# Altium PCB OnkoV1.PcbDoc (part 1 of 2)
Units mil, origin at the board's own origin, x right, y up, seen from the top; angles counter-clockwise.
Board outline 5157.48 x 3228.35 mil, 2 copper layers (Top Layer, Bottom Layer); 231 components, 195 nets, 743 pads, 146 vias.
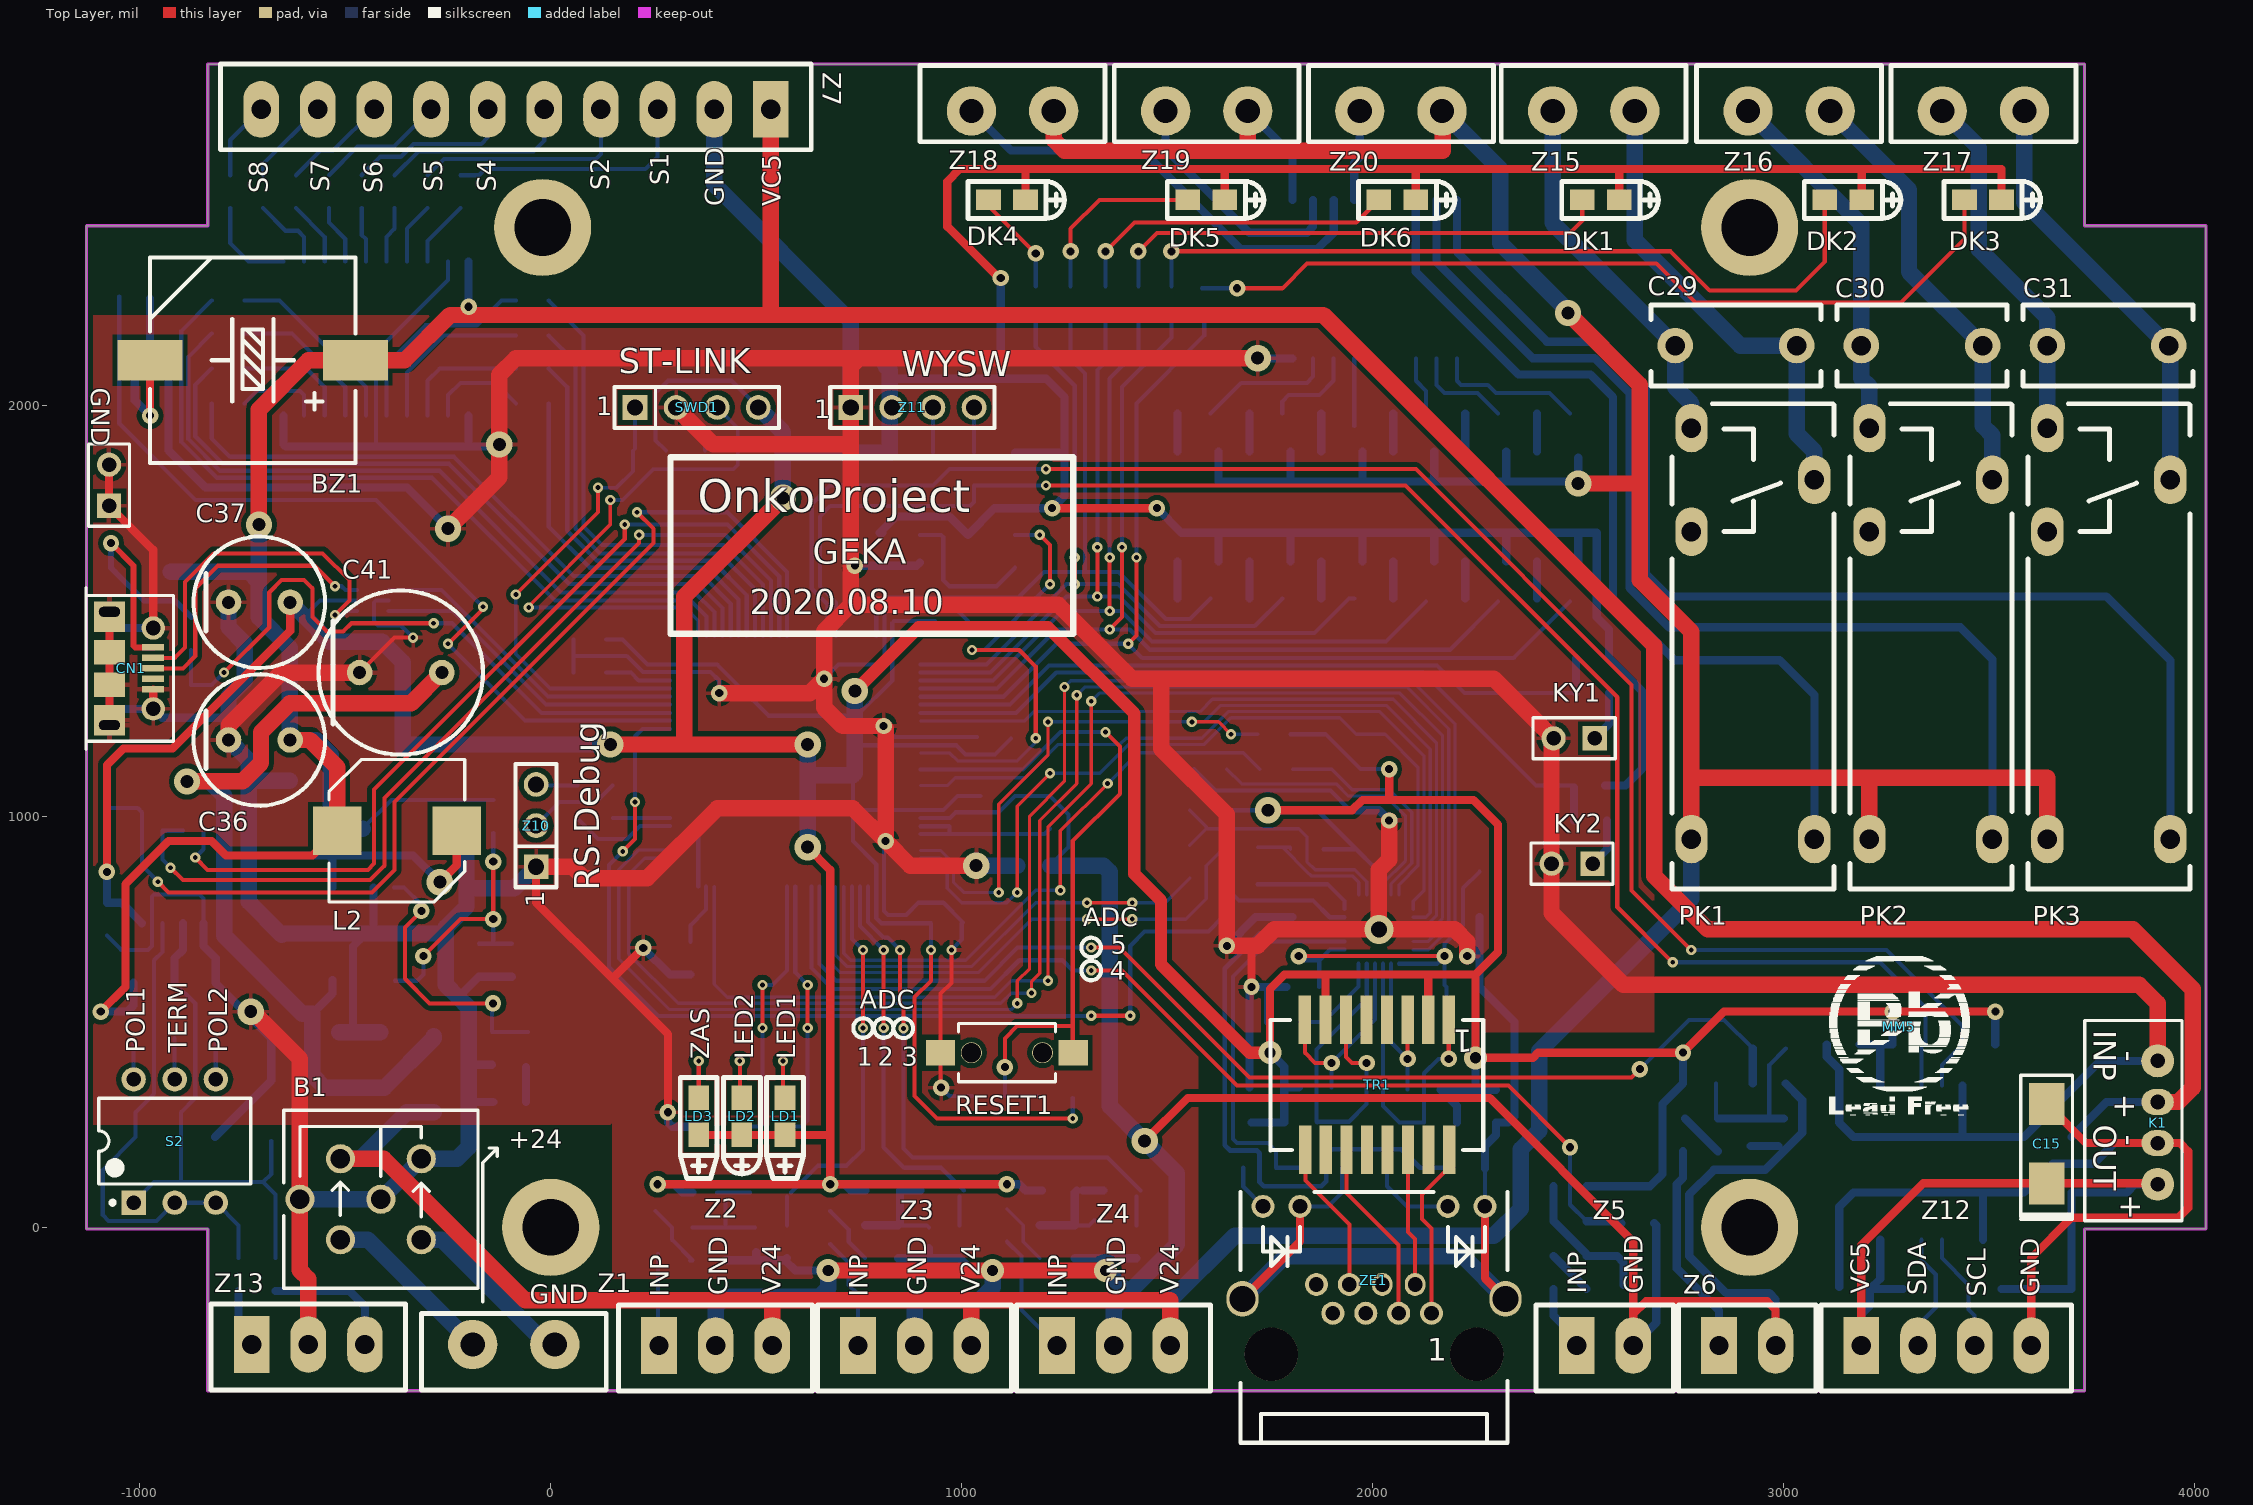
[diagram p0: Top Layer view]
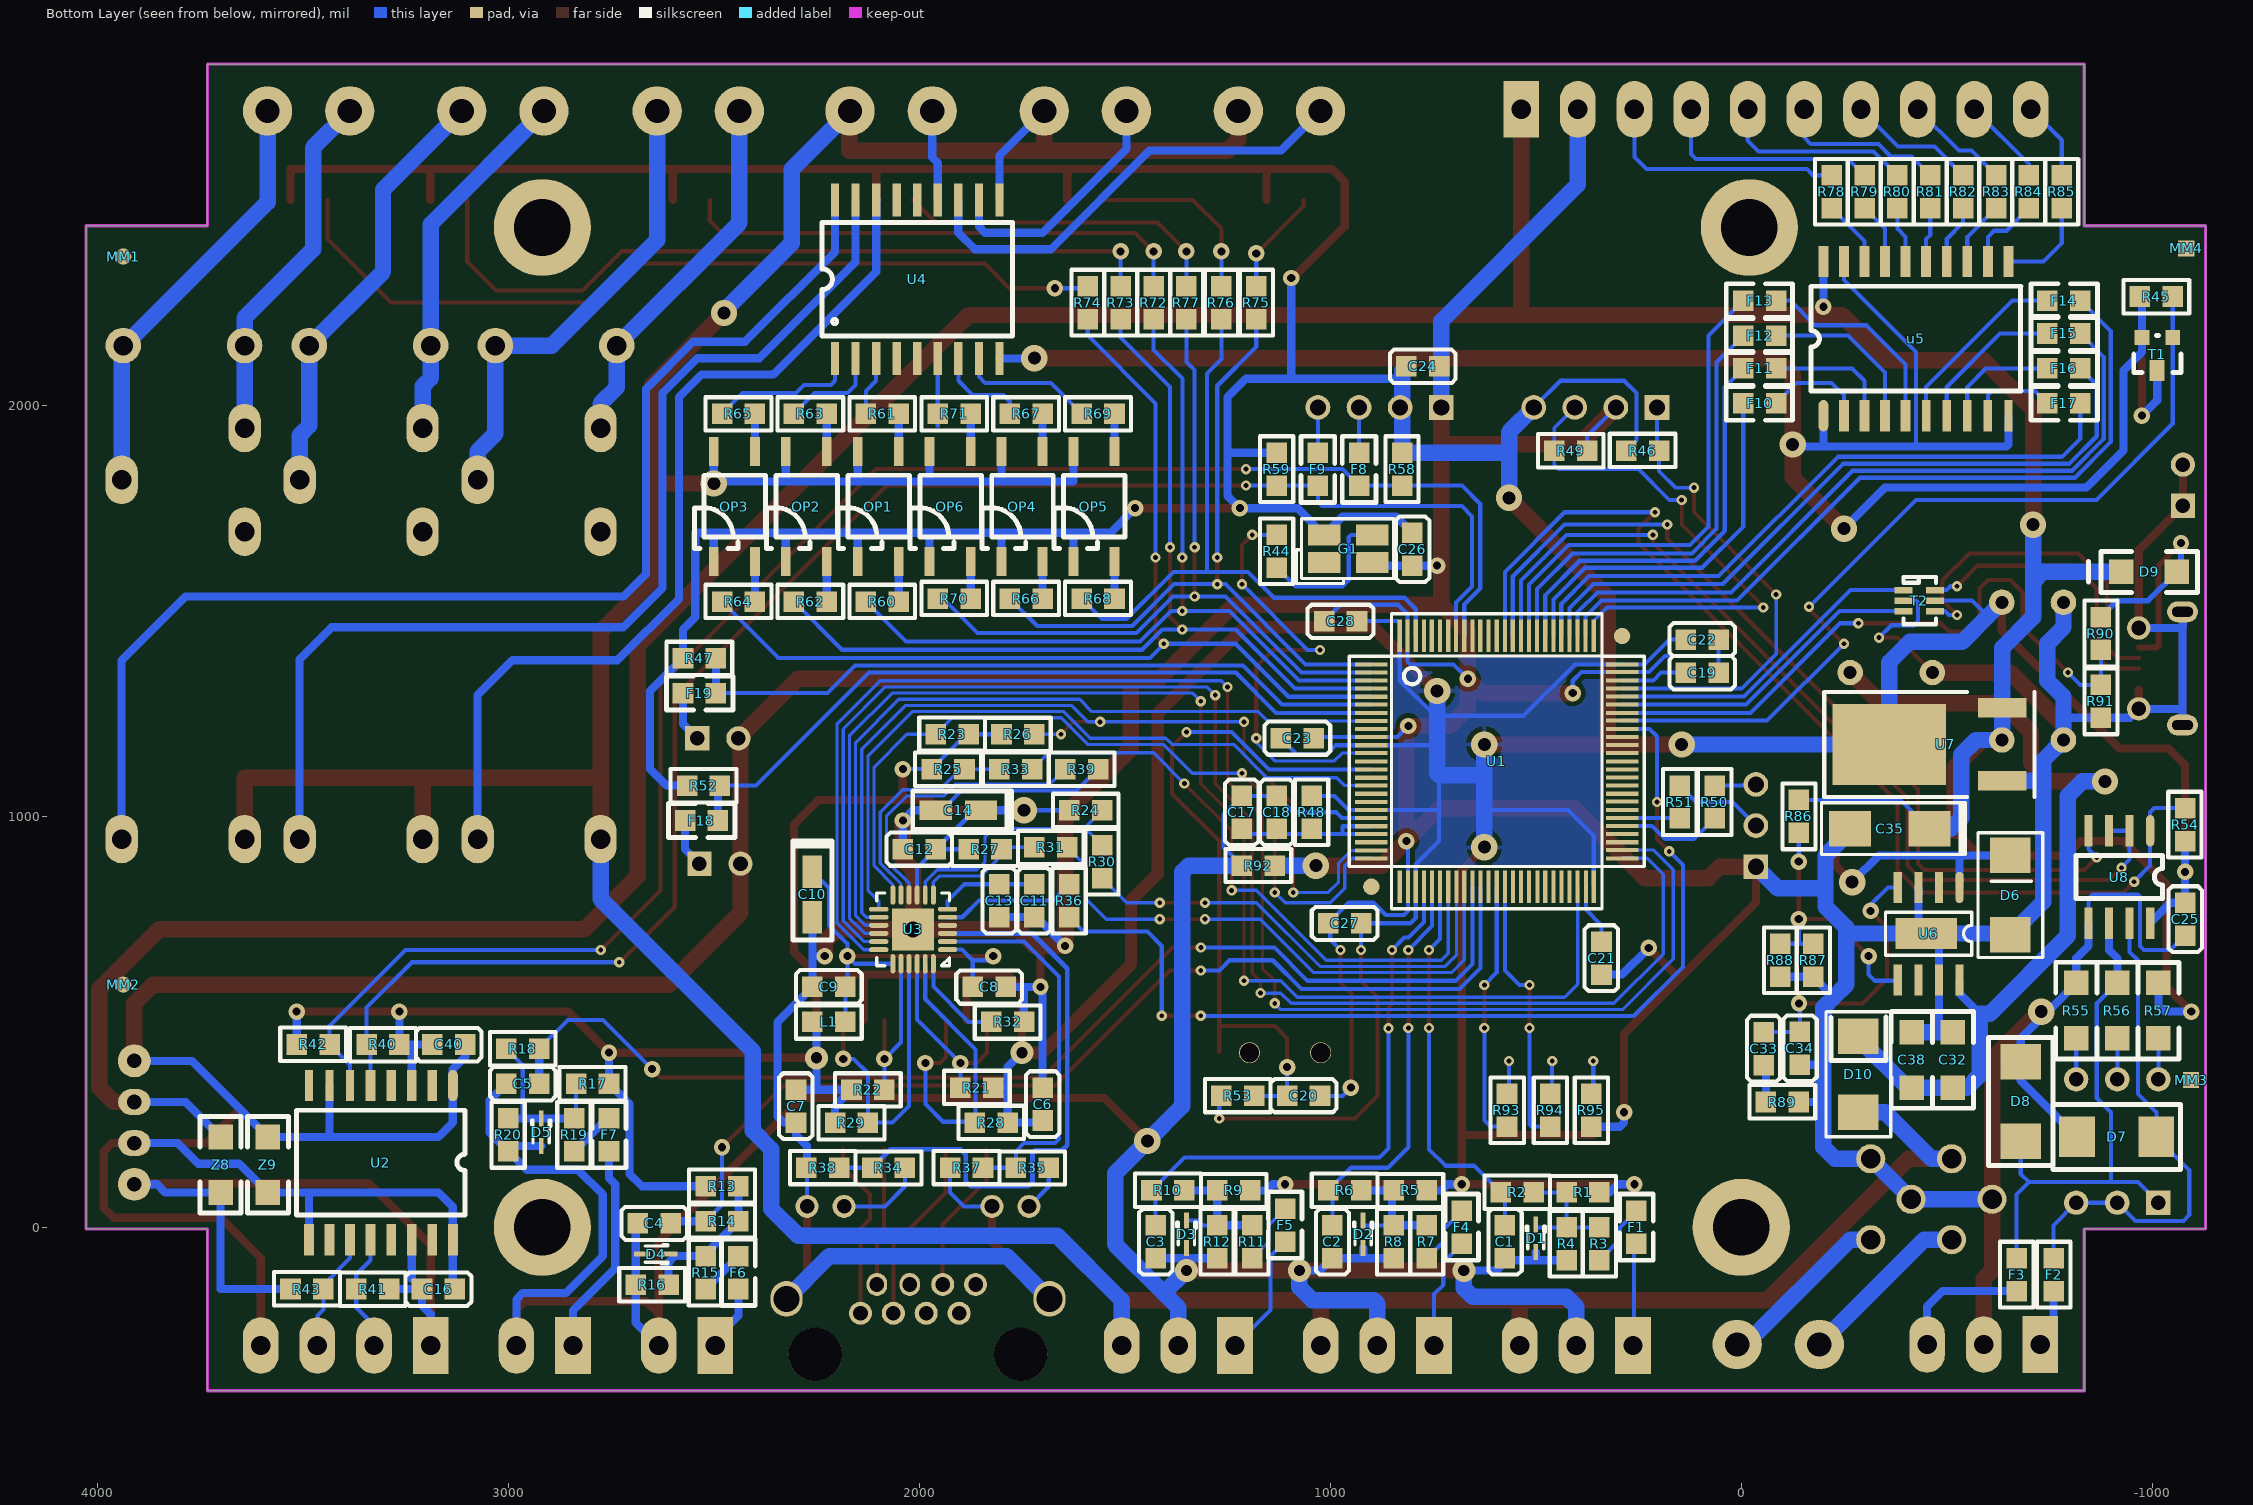
[diagram p1: Bottom Layer view, seen from below]

## Layer stack, top to bottom
Top Layer: signal copper 1.4
Dielectric: dielectric 12.6, FR-4, Dk 4.8
Bottom Layer: signal copper 1.4

## Board outline
-834.65,-397.64 -834.65,-3.94 -1129.92,-3.94 -1129.92,2437.01 -834.65,2437.01 -834.65,2830.71 3732.28,2830.71 3732.28,2437.01 4027.56,2437.01 4027.56,-3.94 3732.28,-3.94 3732.28,-397.64

## Design rules (kind name [scope] priority, off if disabled: settings)
Clearance Clearance_Poly [InPolygon vs not (InPolygon)] p1: gap=12
Clearance [All] p2: gap=7
ComponentClearance [All] p1 off: gap=10 collisioncheckmode=3 verticalgap=10 showdistances=FALSE
DiffPairsRouting [All] p1: maxlimit=10 minlimit=10 mostfreqgap=10 maxuncoupledlength=500
HoleSize [All] p1: absolutevalues=TRUE maxlimit=196.85 minlimit=11.81 maxpercent=80.000 minpercent=20.000
MatchedLengths "Schematic Matched Net Lengths_3" [InNet('RD_N')] p1: tolerance=300 checknetsindiffpair=TRUE checkdiffpairvsdiffpair=TRUE checkothers=TRUE
MatchedLengths "Schematic Matched Net Lengths" [InNet('TD_P')] p2: tolerance=300 checknetsindiffpair=TRUE checkdiffpairvsdiffpair=TRUE checkothers=TRUE
MinimumSolderMaskSliver [All] p1: minsoldermaskwidth=6
PolygonConnect [All] p1: connectstyle=Relief reliefconductorwidth=10 reliefentries=4 polygonreliefangle="90 Angle"
RoutingVias [All] p1: holewidth=12 width=25 viastyle="Through Hole" minholewidth=12 minwidth=25 maxholewidth=40 maxwidth=100
SilkToSilkClearance [All] p1: silktosilkclearance=6
SilkscreenOverComponentPads [All] p1: minsilkscreentomaskgap=4
SolderMaskExpansion [All] p1: expansion=4
Width [All] p1: maxlimit=200 minlimit=8 preferedwidth=10 minimp=50.000000 maximp=50.000000 favimp=50.000000
22 further rules are at their usual default settings.

## Classes and differential pairs
net class Class_4-20: _XA6 _XA7 _XA8 GNDI SCL_I SDA_I VCI5
net class ETHERNET: ERX+ ERX- ETH9 ETH10 ETH11 ETH12 ETH13 ETH14 ETH15 ETH16 ETX+ ETX-
differential pair RD: +RD_P -RD_N
differential pair TD: +TD_P -TD_N
differential pair USB_FS1: +USB_FS1_P -USB_FS1_N

## Components (designator, comment, footprint, x,y, rotation, side; value= is the part's Value field where it differs from the comment)
B1 "BNX002" BNX002 -177.2,284.96 r0 top (schematic designator FF1)
BZ1 "LD-BZEG-1305" LD-BZEG-1305 -475,2110 r0 top
C1 "10n" 0805C 575,5 r270 bottom
C2 "10n" 0805C 995,5 r270 bottom
C3 "10n" 0805C 1425,5 r270 bottom
C4 "10n" 0805C 2605,10 r0 bottom
C5 "10n" 0805C 2925,350 r0 bottom
C6 "100nF" 0805C 1700,340 r270 bottom
C7 "100nF" 0805C 2300,255 r90 bottom
C8 "100nF" 0805C 1790,585 r0 bottom
C9 "100nF" 0805C 2260,585 r180 bottom
C10 "10uF/6v3" CAP_A 2260,755 r90 bottom
C11 "470pF" 0805C 1720,755 r90 bottom
C12 "100nF" 0805C 2040,920 r180 bottom
C13 "2.2uF" 0805C 1805,755 r90 bottom
C14 "10uF/6v3" CAP_A 1960,1015 r180 bottom
C15 "47uF/6V" CAP_C 3640,300 r270 top
C16 "100nF" 0805C 3130,-150 r0 bottom
C17 "2u2" 0805C 1215,970 r90 bottom
C18 "100n" 0805C 1130,970 r90 bottom
C19 "2u2" 0805C 55,1350 r0 bottom
C20 "10n" 0805C 1105,320 r180 bottom
C21 "2u2" 0805C 340,615 r90 bottom
C22 "100n" 0805C 135,1430 r180 bottom
C23 "100n" 0805C 1120,1190 r180 bottom
C24 "100n" 0805C 815,2095 r180 bottom
C25 "100n" 0805C -1080,790 r270 bottom
C26 "100n" 0805C 800,1690 r270 bottom
C27 "100n" 0805C 925,740 r0 bottom
C28 "100n" 0805C 935,1475 r0 bottom
C29 "4n7/3kV" CAP_75 2736.22,2145.67 r180 top (schematic designator C18)
C30 "4n7/3kV" CAP_75 3188.98,2145.67 r180 top (schematic designator C18)
C31 "4n7/3kV" CAP_75 3641.73,2145.67 r180 top (schematic designator C18)
C32 "4u7/25V" 1206 -515.21,475 r270 bottom
C33 "22nF" 0805C -55,395 r90 bottom
C34 "470p" 0805C -142.74,475.89 r270 bottom
C35 "100uF/6v3" CAP_C -265,970 r180 bottom
C36 "470uF/16V" RB-.15/.30 -784.09,1185.94 r0 top
C37 "470uF/16V" RB-.15/.30 -784.09,1520.94 r0 top
C38 "4u7/25V" 1206 -415.21,475 r270 bottom
C40 "100nF" 0805C 3105,445 r0 bottom
C41 "1000uF/25V" RB-.2/.4 -465,1350 r180 top
CN1 "MX-105017-0001" MOLEX_MICROUSB_MX-105017-0001 -995,1360 r270 top
D1 "ESD5Z3.3T1G" SOD_523 500,-60 r90 bottom
D2 "ESD5Z3.3T1G" SOD_523 920,-50 r90 bottom
D3 "ESD5Z3.3T1G" SOD_523 1350,-50 r90 bottom
D4 "ESD5Z3.3T1G" SOD_523 2675,-65 r180 bottom
D5 "ESD5Z3.3T1G" SOD_523 2920,198.07 r90 bottom
D6 "SK26" RD5 -655,712.09 r90 bottom
D7 "SM6T6V8CA" RD5_U -817.09,220 r180 bottom
D8 "SM6T6V8CA" RD5_U -680,402.91 r270 bottom
D9 "CRS14" 1206D -1060.13,1594.79 r0 bottom
D10 "MB1" SMB -285,465.04 r270 bottom
DK1 "" 0805LR 2600,2500 r0 top
DK2 "" 0805LR 3190,2500 r0 top
DK3 "" 0805LR 3530,2500 r0 top
DK4 "" 0805LR 1155,2500 r0 top
DK5 "" 0805LR 1640,2500 r0 top
DK6 "" 0805LR 2105,2500 r0 top
F1 "BLM18BB141SN1D" 0805L 255,-40 r90 bottom
F2 "BLM21A102SPT" 0805 -760,-75 r270 bottom
F3 "BLM21A102SPT" 0805 -670,-75 r270 bottom
F4 "BLM18BB141SN1D" 0805L 680,-40 r90 bottom
F5 "BLM18BB141SN1D" 0805L 1110,-35 r90 bottom
F6 "BLM18BB141SN1D" 0805L 2440,-150 r90 bottom
F7 "BLM18BB141SN1D" 0805L 2755,185 r90 bottom
F8 "BLM18BB141SN1D" 0805L 930,1885 r270 bottom
F9 "BLM18BB141SN1D" 0805L 1030,1885 r270 bottom
F10 "BLM18BB141SN1D" 0805L -85,2005 r0 bottom
F11 "BLM18BB141SN1D" 0805L -85,2090 r0 bottom
F12 "BLM18BB141SN1D" 0805L -85,2170 r0 bottom
F13 "BLM18BB141SN1D" 0805L -85,2255 r0 bottom
F14 "BLM18BB141SN1D" 0805L -745,2255 r180 bottom
F15 "BLM18BB141SN1D" 0805L -745,2175 r180 bottom
F16 "BLM18BB141SN1D" 0805L -745,2090 r180 bottom
F17 "BLM18BB141SN1D" 0805L -745,2005 r180 bottom
F18 "BLM18BB141SN1D" 0805L 2570,990 r180 bottom
F19 "BLM18BB141SN1D" 0805L 2575,1300 r180 bottom
G1 "CFPS-39-25M" GEN_SMD1_1 1015,1618 r180 bottom
GND "Header 2" HDR1X2 -1074.8,1755.91 r90 top
K1 "DC1S-0505S" DCDC_SIL4 3910,405 r270 top
KY1 "Header 2" HDR1X2 2540,1190 r180 top
KY2 "Header 2" HDR1X2 2535,885 r180 top
L1 "BLM18PG121SN1D" 0805 2180,500 r0 bottom
L2 "DER0705-15" DER0705_1 -228.66,965 r180 top
LD1 "" 0805LG 570,225 r270 top
LD2 "" 0805LR 465,225 r270 top
LD3 "" 0805LG 360,225 r270 top
MM1 "" REF_CIR 3937.01,2362.2 r180 bottom
MM2 "" REF_CIR 3937.01,590.55 r270 bottom
MM3 "" REF_SQR -1094.49,358.27 r270 bottom
MM4 "" REF_SQR -1082.68,2381.89 r270 bottom
MM5 "" PB_FREE_GRAF 3279.53,488.19 r0 top
OP1 "TLP181" TLP181_1 2150,1620 r180 bottom
OP2 "TLP181" TLP181_1 2325,1620 r180 bottom
OP3 "TLP181" TLP181_1 2500,1620 r180 bottom
OP4 "TLP181" TLP181_1 1800,1620 r180 bottom
OP5 "TLP181" TLP181_1 1625,1620 r180 bottom
OP6 "TLP181" TLP181_1 1975,1620 r180 bottom
PK1 "RM96" RM96A 2775.59,944.88 r90 top
PK2 "RM96" RM96A 3208.66,944.88 r90 top
PK3 "RM96" RM96A 3641.73,944.88 r90 top
R1 "nc" 0805R 345,85 r0 bottom
R2 "100R" 0805R 585,85 r180 bottom
R3 "2k2" 0805R 345,-80 r90 bottom
R4 "1k" 0805R 425,-80 r90 bottom
R5 "nc" 0805R 765,90 r0 bottom
R6 "100R" 0805R 1005,90 r180 bottom
R7 "680R" 0805R 765,-75 r90 bottom
R8 "1k" 0805R 845,-75 r90 bottom
R9 "nc" 0805R 1195,90 r0 bottom
R10 "100R" 0805R 1435,90 r180 bottom
R11 "680R" 0805R 1190,-75 r90 bottom
R12 "1k" 0805R 1275,-75 r90 bottom
R13 "nc" 0805R 2520,100 r180 bottom
R14 "100R" 0805R 2520,15 r180 bottom
R15 "680R" 0805R 2520,-150 r90 bottom
R16 "1k" 0805R 2690,-140 r180 bottom
R17 "nc" 0805R 2755,350 r0 bottom
R18 "100R" 0805R 2925,435 r0 bottom
R19 "2k2" 0805R 2840,185 r90 bottom
R20 "1k" 0805R 3000,185 r90 bottom
R21 "50R" 0805R 1900,340 r180 bottom
R22 "50R" 0805R 2085,335 r0 bottom
R23 "4k7" 0805R 1960,1200 r180 bottom
R24 "4k7" 0805R 1555,1015 r0 bottom
R25 "4k7" 0805R 1890,1115 r0 bottom
R26 "4k7" 0805R 1720,1200 r0 bottom
R27 "4k7" 0805R 1800,920 r0 bottom
R28 "50R" 0805R 1865,255 r180 bottom
R29 "50R" 0805R 2125,255 r0 bottom
R30 "33R" 0805R 1555,850 r90 bottom
R31 "33R" 0805R 1640,925 r0 bottom
R32 "12k1" 0805R 1745,500 r0 bottom
R33 "33R" 0805R 1725,1115 r0 bottom
R34 "1k" 0805R 2035,145 r0 bottom
R35 "1k" 0805R 1685,145 r0 bottom
R36 "33R" 0805R 1635,755 r90 bottom
R37 "10k" 0805R 1925,145 r180 bottom
R38 "10k" 0805R 2275,145 r180 bottom
R39 "4k7" 0805R 1565,1115 r0 bottom
R40 "4k7" 0805R 3265,445 r0 bottom
R41 "4k7" 0805R 3290,-150 r0 bottom
R42 "4k7" 0805R 3515,445 r180 bottom
R43 "4k7" 0805R 3530,-150 r180 bottom
R44 "33R" 0805R 1130,1605 r90 bottom
R45 "10k" 0805 -1050,2265 r0 bottom
R46 "10k" 0805R 280,1890 r180 bottom
R47 "10k" 0805R 2495,1385 r0 bottom
R48 "100R" 0805 1045,970 r90 bottom
R49 "10k" 0805R 375,1890 r0 bottom
R50 "33R" 0805R 65,1075 r270 bottom
R51 "33R" 0805R 150,1075 r270 bottom
R52 "10k" 0805R 2485,1075 r0 bottom
R53 "10k" 0805R 1265,320 r180 bottom
R54 "10k" 0805R -1080,940 r90 bottom
R55 "470R" 1206 -815,460 r90 bottom
R56 "120R" 1206 -915,460 r90 bottom
R57 "470R" 1206 -1014.79,459.87 r90 bottom
R58 "10k" 0805R 825,1805 r90 bottom
R59 "10k" 0805R 1130,1805 r90 bottom
R60 "1k" 0805R 2130,1522.72 r180 bottom
R61 "4k7" 0805R 2050,1980 r0 bottom
R62 "1k" 0805R 2305,1522.72 r180 bottom
R63 "4k7" 0805R 2225,1980 r0 bottom
R64 "1k" 0805R 2480,1522.72 r180 bottom
R65 "4k7" 0805R 2400,1980 r0 bottom
R66 "1k" 0805R 1780,1530 r180 bottom
R67 "4k7" 0805R 1700,1980 r0 bottom
R68 "1k" 0805R 1605,1530 r180 bottom
R69 "4k7" 0805R 1525,1980 r0 bottom
R70 "1k" 0805R 1955,1530 r180 bottom
R71 "4k7" 0805R 1875,1980 r0 bottom
R72 "1k" 0805R 1430,2290 r270 bottom
R73 "1k" 0805R 1510,2290 r270 bottom
R74 "1k" 0805R 1590,2290 r270 bottom
R75 "1k" 0805R 1180,2290 r270 bottom
R76 "1k" 0805R 1265,2290 r270 bottom
R77 "1k" 0805R 1350,2290 r270 bottom
R78 "1k" 0805R -220,2480 r90 bottom
R79 "1k" 0805R -300,2480 r90 bottom
R80 "1k" 0805R -380,2480 r90 bottom
R81 "1k" 0805R -460,2480 r90 bottom
R82 "1k" 0805R -540,2480 r90 bottom
R83 "1k" 0805R -620,2480 r90 bottom
R84 "1k" 0805R -700,2480 r90 bottom
R85 "1k" 0805R -780,2480 r90 bottom
R86 "10k" 0805R -140,1040 r270 bottom
R87 "3k3" 0805R -175,690 r270 bottom
R88 "100k" 0805R -95,690 r270 bottom
R89 "4k7" 0805R -60,305 r180 bottom
R90 "1k" 0805R -875,1485 r270 bottom
R91 "4k7" 0805R -875,1320 r270 bottom
R92 "0R" 0805 1215,880 r180 bottom
R93 "4k7" 0805R 570,325 r270 bottom
R94 "4k7" 0805R 465,325 r270 bottom
R95 "4k7" 0805R 365,325 r270 bottom
RESET1 "SW-PB" DTSM31N_2 1110,425 r90 top
S2 "SW DIP-3" DIP-6 -915,210 r90 top
SWD1 "ST-LINK" PIN4 205,1995 r0 top
T1 "2N7002" SOT23 -1011,2078 r270 bottom
T2 "USBUF01W6" SOTT323-6L -395,1550.59 r270 bottom
TR1 "H1102NL" H1102 2185,505 r180 top locked
U1 "STM32F427VGT6" VQ100_2 900,1370 r90 bottom locked
U2 "ADuM2250" SMD16B 3135,345 r180 bottom
U3 "LAN8742A-CZ-TR" QFN24_LAN 2015,725 r180 bottom
U4 "ULN2803A" SO-18 2205,2114.17 r180 bottom
u5 "74HCT541D" SMD20 -200,1975 r90 bottom
U6 "L5973D_2" SO8_M -531,827 r0 bottom
U7 "LD1117V33" DPAK -635,1087 r90 bottom
U8 "MAX485" SO8 -995,965 r90 bottom
Z1 "CON2" ARC-L-2-5.08 10,-285 r180 top
Z2 "Header 3" ARC-L-3-3.5 263.31,-287.4 r0 top
Z3 "Header 3" ARC-L-3-3.5 747.56,-287.4 r0 top
Z4 "Header 3" ARC-L-3-3.5 1231.81,-287.4 r0 top
Z5 "Header 2" ARC-L-2-3.5 2496.06,-287.4 r0 top locked
Z6 "Header 2" ARC-L-2-3.5 2842.52,-287.4 r0 top locked
Z7 "Header 10" ARC-L-10-3.5 535.43,2720.47 r180 top
Z8 "0R" 1206R 3700,220 r90 bottom
Z9 "0R" 1206R 3585,220 r90 bottom
Z10 "RS-Debug" PIN3 -35.65,877.67 r0 top
Z11 "WYSW" PIN4 730,1995 r0 top
Z12 "Header 4" ARC-L-4-3.5 3188.98,-287.4 r0 top locked
Z13 "Header 3" ARC-L-3-3.5 -727.79,-285 r0 top
Z15 "CON2" ARC-L-2-5.08 2437.8,2716.54 r0 top
Z16 "CON2" ARC-L-2-5.08 2913.39,2716.54 r0 top
Z17 "CON2" ARC-L-2-5.08 3385.83,2716.54 r0 top
Z18 "CON2" ARC-L-2-5.08 1023.62,2716.54 r0 top
Z19 "CON2" ARC-L-2-5.08 1496.06,2716.54 r0 top
Z20 "CON2" ARC-L-2-5.08 1968.5,2716.54 r0 top
ZE1 "WURTH 615 008 137 421" RJ45GELED 1753.11,-308.98 r0 top locked

## Footprints (in the part's own frame and the unit in brackets; to place one, negate y for a bottom-side part, rotate by r counter-clockwise, add the part's x,y. Pads: shape width x height; smd on the part's side, far side on the other; paste and mask are expansions set on the pad)
0805 [mil]
  rect 50x50 smd: 1(0,0) 2(80,0)
  silkscreen extent -40,-40 120,41
0805C [mil]
  rect 50x50 smd: 1(0,0) 2(80,0)
  silkscreen extent -40,-40 120,41
0805L [mil]
  rect 50x50 smd: 1(0,0) 2(80,0)
  silkscreen extent -40,-41 122,41
0805LG [mil]
  rect 60x50 smd: A(0,0) K(-90,0)
  silkscreen extent -140,-45 106,45
0805LR [mil]
  rect 60x50 smd: A(0,0) K(-90,0)
  silkscreen extent -140,-45 95,45
0805R [mil]
  rect 50x50 smd: 1(0,0) 2(80,0)
  silkscreen extent -40,-40 120,41
1206 [mil]
  rect 60x60 smd: 1(0.13,-0.21) 2(135.13,-0.21)
  silkscreen extent -50,-50 185,50
1206D [mil]
  rect 60x60 smd: A(0.13,-0.21) K(135.13,-0.21)
  silkscreen extent -50,-50 215,50
1206R [mil]
  rect 60x60 smd: 1(0,0) 2(-135,0)
  silkscreen extent -185,-50 50,50
ARC-L-2-3.5 [mm]
  rect 2.2x3.5 hole 1.2: 1(0,0)
  oval 2.2x3.5 hole 1.2: 2(3.5,0)
  silkscreen extent -2.5,-2.8 6,2.5
ARC-L-2-5.08 [mil]
  round 120 hole 59.06: 1(0,0) 2(200,0)
  silkscreen extent -125,-75 325,110
ARC-L-3-3.5 [mm]
  rect 2.2x3.5 hole 1.2: 1(0,0)
  oval 2.2x3.5 hole 1.2: 2(3.5,0) 3(7,0)
  silkscreen extent -2.5,-2.8 9.5,2.5
ARC-L-4-3.5 [mm]
  rect 2.2x3.5 hole 1.2: 1(0,0)
  oval 2.2x3.5 hole 1.2: 2(3.5,0) 3(7,0) 4(10.5,0)
  silkscreen extent -2.5,-2.8 13,2.5
ARC-L-10-3.5 [mm]
  rect 2.2x3.5 hole 1.2: 1(0,0)
  oval 2.2x3.5 hole 1.2: 2(3.5,0) 3(7,0) 4(10.5,0) 5(14,0) 6(17.5,0) 7(21,0) 8(24.5,0) 9(28,0) 10(31.5,0)
  silkscreen extent -2.5,-2.8 34,2.5
BNX002 [mm]
  round 1.8 hole 1.2: B(-8.5,-8) CB(-8.5,-3) CG1(-3.5,-3) CG2(-6,-5.5) CG3(-11,-5.5) PSG(-3.5,-8)
  silkscreen extent -12,-11 0,0
CAP_75 [mm]
  round 2.2 hole 1.2: 1(0,0) 2(-7.5,0)
  silkscreen extent -9,-2.5 1.5,2.5
CAP_A [mm]
  rect 2x1.2 smd: 1(0,0) 2(2.8,0)
  silkscreen extent -1.42,-1.21 4.7,1.2
CAP_C [mm]
  rect 2.6x2.2 smd: 1(0,0) 2(4.9,0)
  silkscreen extent -1.78,-1.6 7.11,1.6
DCDC_SIL4 [mm]
  round 2.032 hole 0.9: 1(0,0) 4(7.62,0)
  oval 1.6x2 hole 0.9: 2(2.54,0) 3(5.08,0)
  silkscreen extent -2.5,-4.5 9.88,1.5
DER0705_1 [mm]
  rect 3x3 smd: 1(0,0) 2(7.4,0)
  silkscreen extent -0.5,-4.4 7.9,4.4
DIP-6 [mm] "DIP; 6 Leads; Row Spacing 7.62 mm; Pitch 2.54 mm"
  rect 1.5x1.5 hole 0.9: 1(-3.81,2.54)
  round 1.5 hole 0.9: 2(-3.81,0) 3(-3.81,-2.54) 4(3.81,-2.54) 5(3.81,0) 6(3.81,2.54)
  silkscreen extent -3.93,-4.7 2.65,4.7, body extent -3.55,-4.7 3.55,4.7, height 5.46
DPAK [mil]
  rect 47x118 smd: 1(0,0) 3(177,0)
  rect 197x276 smd: 2(88,275)
  silkscreen extent -40,-79 216,433
DTSM31N_2 [mm]
  round 1.3 hole 1.2 mask+0: 0(0,2.2) 0(0,-2.2)
  rect 1.6x1.8 smd: 1(0,4.1) 2(0,-4.1)
  silkscreen extent -1.8,-3 1.8,3
GEN_SMD1_1 [mm]
  rect 2x1.3 smd: 1(0,0) 2(2.972,0) 3(2.972,1.702) 4(0,1.702)
  silkscreen extent -1.7,-1.3 4.3,2.7
H1102 [mm]
  rect 0.76x3 smd: 1(0,0) 2(1.27,0) 3(2.54,0) 4(3.81,0) 5(5.08,0) 6(6.35,0) 7(7.62,0) 8(8.89,0) 9(8.865,8.026) 10(7.595,8.026) 11(6.325,8.026) 12(5.055,8.026) 13(3.785,8.026) 14(2.515,8.026) 15(1.245,8.026) 16(-0.025,8.026)
  silkscreen extent -2.13,0 11.02,8.08
HDR1X2 [mm] "Connector; Header; 2 Position"
  rect 1.5x1.5 hole 0.9: 1(0,0)
  round 1.5 hole 0.9: 2(2.54,0)
  silkscreen extent -1.27,-1.27 3.81,1.27
LD-BZEG-1305 [mm]
  rect 4x2.524 smd: 1(0,0) 2(-12.7,0)
  silkscreen extent -12.7,-6.35 0,6.35
MOLEX_MICROUSB_MX-105017-0001 [mm]
  rect 0.4x1.35 smd mask+0.152: 1(-1.3,0.7) 2(-0.65,0.7) 3(0,0.7) 4(0.65,0.7) 5(1.3,0.7)
  oval 1.3x1.9 hole 0.6 slot 1.3 at 90 deg: 6(-3.5,-2) 6(3.5,-2)
  rect 1.9x1.9 smd: 6(-3.2,-2) 6(3.2,-2)
  round 1.45 hole 0.9 mask+0.152: 6(-2.5,0.7) 6(2.5,0.7)
  rect 1.5x1.9 smd: 6(-1,-2) 6(1,-2)
  silkscreen extent -5,-3.45 5,1.95
PB_FREE_GRAF [mil]
  silkscreen extent -169,-215 174,181
PIN3 [mil]
  rect 60x60 hole 39.37: 1(0,0)
  round 60 hole 39.37: 2(0,100) 3(0,200)
  silkscreen extent -50,-50 50,250
PIN4 [mil]
  rect 60x60 hole 39.37: 1(0,0)
  round 60 hole 39.37: 2(100,0) 3(200,0) 4(300,0)
  silkscreen extent -50,-50 350,50
QFN24_LAN [mm]
  oval 1.2x0.3 smd mask+0.152: 1(2.125,-1.25) 2(2.125,-0.75) 3(2.125,-0.25) 4(2.125,0.25) 5(2.125,0.75) 6(2.125,1.25) 13(-2.125,1.25) 14(-2.125,0.75) 15(-2.125,0.25) 16(-2.125,-0.25) 17(-2.125,-0.75) 18(-2.125,-1.25)
  oval 0.3x1.2 smd mask+0.152: 7(1.25,2.125) 8(0.75,2.125) 9(0.25,2.125) 10(-0.25,2.125) 11(-0.75,2.125) 12(-1.25,2.125) 19(-1.25,-2.125) 20(-0.75,-2.125) 21(-0.25,-2.125) 22(0.25,-2.125) 23(0.75,-2.125) 24(1.25,-2.125)
  rect 2.6x2.6 smd mask+0.152: 25(0,0)
  silkscreen extent -2.25,-2.25 2.25,2.25
RB-.2/.4 [mil]
  round 62 hole 31.5: 1(0,0) 2(-200,0)
  silkscreen extent -300,-200 100,200
RB-.15/.30 [mil]
  round 62 hole 31.5: 1(0,0) 2(150,0)
  silkscreen extent -85,-160 235,160
RD5 [mm]
  rect 2.2x2.5 smd: A(0,0) K(4.9,0)
  silkscreen extent -1.4,-2 6.3,2
RD5_U [mm]
  rect 2.2x2.5 smd: A(0,0) K(4.9,0)
  silkscreen extent -1.5,-2 6.4,2
REF_CIR [mm]
  round 1 smd paste-0.5 mask+0.5: ""(0,0)
REF_SQR [mm]
  rect 1x1 smd paste-0.5 mask+0.5: ""(0,0)
RJ45GELED [mil]
  round 129.92 hole 129.92: 0(0,0) 0(500,0)
  round 56 hole 35.43: 1(390,100) 3(310,100) 5(230,100) 6(190,170) 7(150,100) 8(110,170) 9(520,360) 10(430,360) 11(70,360) 12(-20,360)
  oval 50x56 hole 35.43: 2(350,170) 4(270,170)
  oval 78.74x86.61 hole 62.99: G1(-70,135) G2(570,135)
  silkscreen extent -75,-215 575,395
RM96A [mm]
  oval 3x2 hole 1.2: 1(0,0) 2(0,-7.6) 3(19,0) 4(22.2,-7.6) 5(25.4,0)
  silkscreen extent -3.1,-8.8 26.9,1.2
SMB [mm]
  rect 2.2x2.5 smd: A(4.7,0) K(0,0)
  silkscreen extent -1.52,-2 6.22,2
SMD16B [mil]
  oval 24x76 smd: 1(0,0)
  rect 24x76 smd: 2(-50,0) 3(-100,0) 4(-150,0) 5(-200,0) 9(-350,-375) 10(-300,-375) 11(-250,-375) 12(-200,-375) 13(-150,-375) 14(-100,-375) 15(-50,-375) 16(0,-375)
  rect 20x76 smd: 6(-250,0) 7(-300,0) 8(-350,0)
  silkscreen extent -380,-315 30,-60
SMD20 [mil]
  oval 76x24 smd: 1(0,0)
  rect 76x24 smd: 2(0,-50) 3(0,-100) 4(0,-150) 5(0,-200) 11(375,-450) 12(375,-400) 13(375,-350) 14(375,-300) 15(375,-250) 16(375,-200) 17(375,-150) 18(375,-100) 19(375,-50) 20(375,0)
  rect 76x20 smd: 6(0,-250) 7(0,-300) 8(0,-350) 9(0,-400) 10(0,-450)
  silkscreen extent 60,-480 315,30
SO8 [mil]
  oval 76x20 smd: 1(0,0)
  rect 76x20 smd: 2(0,50) 3(0,100) 4(0,150) 5(-225,150) 6(-225,100) 7(-225,50) 8(-225,0)
  silkscreen extent -165,-30 -60,180
SO8_M [mil]
  oval 20x76 smd: 1(0,0)
  rect 20x76 smd: 2(50,0) 3(100,0) 4(150,0) 5(150,225) 6(100,225) 7(50,225) 8(0,225)
  rect 150x75 smd: 9(81,112)
  silkscreen extent -30,60 180,165
SO-18 [mil]
  rect 20x80 smd: 1(0,0) 2(50,0) 3(100,0) 4(150,0) 5(200,0) 6(250,0) 7(300,0) 8(350,0) 9(400,0) 10(400,385.83) 11(350,385.83) 12(300,385.83) 13(250,385.83) 14(200,385.83) 15(150,385.83) 16(100,385.83) 17(50,385.83) 18(0,385.83)
  silkscreen extent -31,55 431,331
SOD_523 [mm]
  rect 1x0.3 smd: A(0,0) K(1.7,0)
  silkscreen extent 0.2,-0.6 1.6,0.6
SOT23 [mil]
  rect 36x36 smd: 1(-87,39) 2(-87,-36)
  rect 50x36 smd: 3(-7,1)
  silkscreen extent -92,-56 -2,59
SOTT323-6L [mm]
  rect 0.4x1.1 smd mask+0.152: 1(0,0) 2(0.65,0) 3(1.3,0) 4(1.3,1.95) 5(0.65,1.95) 6(0,1.95)
  silkscreen extent -0.81,0 2.11,2.01
TLP181_1 [mm]
  rect 0.6x1.8 smd: 1(0,0) 2(2.54,0) 3(2.54,6.8) 4(0,6.8)
  silkscreen extent -1.2,0.8 3.2,5.33
VQ100_2 [mil]
  rect 10x79 smd mask+6: 1(0,0) 2(-20,0) 3(-39,0) 4(-59,0) 5(-79,0) 6(-98,0) 7(-118,0) 8(-138,0) 9(-157,0) 10(-177,0) 11(-197,0) 12(-216,0) 13(-236,0) 14(-256,0) 15(-276,0) 16(-295,0) 17(-315,0) 18(-335,0) 19(-354,0) 20(-374,0) 21(-394,0) 22(-413,0) 23(-433,0) 24(-453,0) 25(-472,0) 51(-472,-610) 52(-452,-610) 53(-433,-610) 54(-413,-610) 55(-393,-610) 56(-374,-610) 57(-354,-610) 58(-334,-610) 59(-315,-610) 60(-295,-610) 61(-275,-610) 62(-256,-610) 63(-236,-610) 64(-216,-610) 65(-196,-610) 66(-177,-610) 67(-157,-610) 68(-137,-610) 69(-118,-610) 70(-98,-610) 71(-78,-610) 72(-59,-610) 73(-39,-610) 74(-19,-610) 75(0,-610)
  rect 79x10 smd mask+6: 26(-541,-69) 27(-541,-89) 28(-541,-108) 29(-541,-128) 30(-541,-148) 31(-541,-167) 32(-541,-187) 33(-541,-207) 34(-541,-226) 35(-541,-246) 36(-541,-266) 37(-541,-285) 38(-541,-305) 39(-541,-325) 40(-541,-345) 41(-541,-364) 42(-541,-384) 43(-541,-404) 44(-541,-423) 45(-541,-443) 46(-541,-463) 47(-541,-482) 48(-541,-502) 49(-541,-522) 50(-541,-541) 76(69,-541) 77(69,-521) 78(69,-502) 79(69,-482) 80(69,-462) 81(69,-443) 82(69,-423) 83(69,-403) 84(69,-384) 85(69,-364) 86(69,-344) 87(69,-325) 88(69,-305) 89(69,-285) 90(69,-265) 91(69,-246) 92(69,-226) 93(69,-206) 94(69,-187) 95(69,-167) 96(69,-147) 97(69,-128) 98(69,-108) 99(69,-88) 100(69,-69)
  round 40 smd paste-20 mask+20: 101(-541,0) 102(68.9,-610)
  silkscreen extent -595,-664 123,54

## Part data
BZ1: library part BUZZER
C1 C2 C3 C4 C5 C17 C18 C19 C20 C21 C22 C23 C24 C25 C26 C27 C28 C33 C34: library part CAP, "Capacitor"
C6 C7 C8 C9 C12: library part Cap_100nF_X7R_10%_0402, "Capacitor,100nF,16V,X7R,10%,0402,YAGEO"
C10 C14: library part CapTantal
C11: library part Cap_470pF_X7R_10%_0402, "Capacitor,470pF,16V,X7R,10%,0402,YAGEO"
C13: library part Cap_1uF_X5R_10%_0603, "Capacitor,1uF,16V,X5R,10%,0603,YAGEO"
C15 C35 C36 C37 C41: library part CAP_TANTAL_SMD, "KONDENSATOR ELEKTROLITYCZNY TANTALOWY SMD"
C16 C40: library part ProE70.tmp_100n_4
C29 C30 C31 C32 C38: library part CAP
CN1: library part USB-MICRO-AB
D1 D2 D3 D4 D5: library part "DIODE SCHOTTKY"
D6 D7 D8 D9: library part "DIODE SCHOTTKY", "Schottky Diode"
D10: library part Diode, "Default Diode"
DK1 DK2 DK3 DK4 DK5 DK6 LD1 LD2 LD3: library part LED
F1 F2 F3 F4 F5 F6 F7 F8 F9 F10 F11 F12 F13 F14 F15 F16 F17 F18 F19: library part KORALIK, "Koralik ferrytowy"
G1: library part GENER_SMD
GND KY1 KY2 Z5 Z6: "Header, 2-Pin"
K1: library part DCDC_AM1S
L1: library part BEAD_120R_2A_0603, "Bead,120R,2A,0603,BLM18PG121SN1D,MURATA"
L2: library part CEWKA_1
MM1 MM2 MM3 MM4 MM5: library part MECH
OP1 OP2 OP3 OP4 OP5 OP6: library part TLP621, "Optoisolator"
R1 R2 R3 R4 R5 R6 R7 R8 R9 R10 R11 R12 R13 R14 R15 R16 R17 R18 R19 R20 R21 R22 R23 R24 R25 R26 R27 R28 R29 R30 R31 R32 R33 R34 R35 R36 R37 R38 R39 R40 R41 R42 R43 R44 R45 R46 R47 R48 R49 R50 R51 R52 R53 R54 R55 R56 R57 R58 R59 R60 R61 R62 R63 R64 R65 R66 R67 R68 R69 R70 R71 R72 R73 R74 R75 R76 R77 R78 R79 R80 R81 R82 R83 R84 R85 R86 R87 R88 R89 R90 R91 R92 R93 R94 R95: library part RES3
S2: "DIP Switch, 3 Position, SPST"
SWD1: library part SW_CON, "Header, 4-Pin"
T1: library part MOSFET-P_1_1
U1: library part STM32F427_LQFP100
U3: "LAN8742A-CZ-TR - Small Footprint RMII 10/100 Ethernet, Transceiver with HP Auto-MDIX and flexPWR Technology SQFN-24"
U4: library part Pro31.tmp_ULN2803A_42
u5: library part 74541
U8: library part MAX485_1
Z1 Z15 Z16 Z17 Z18 Z19 Z20: "Connector"
Z2 Z3 Z4 Z13: "Header, 3-Pin"
Z7: "Header, 10-Pin"
Z8 Z9: library part "Res Semi", "Semiconductor Resistor"
Z10: library part "Header 3", "Header, 3-Pin"
Z11: library part CON4, "Connector"
Z12: "Header, 4-Pin"
ZE1: library part RJ45GELED

## Free pads (board coordinates)
  round 236.22 hole 137.8: 0(-19.69,2433.07) 0(0,0) 0(2917.32,0) 0(2917.32,2433.07)

## Via types
v1: diameter 25, hole 11.81, Top Layer to Bottom Layer, tented both sides, 71 vias
v2: diameter 40, hole 19.68, Top Layer to Bottom Layer, tented both sides, 47 vias
v3: diameter 64, hole 31.5, Top Layer to Bottom Layer, tented both sides, 16 vias
v4: diameter 56, hole 27.56, Top Layer to Bottom Layer, tented both sides, 5 vias
v5: diameter 25, hole 11.81, Top Layer to Bottom Layer, tented bottom, 5 vias
v6: diameter 70.87, hole 39.37, Top Layer to Bottom Layer, tented both sides, 1 vias
v7: diameter 64, hole 31.5, Top Layer to Bottom Layer, 1 vias

## Nets (pads, with @x,y where several pads share a name; then routed paths per layer and width w, separated by ;. In a path a pad name is that pad's centre, name@x,y a point inside that pad or via, vN(x,y) a via of type N, cw(c..) or ccw(c..) an arc to the next point about the centre after c; other vN are vias at no path point)
/RST: C20.1 R53.2 RESET1.2 U1.14 | length 1725.8
  Top Layer w10: v2(1105,390) 1105,460 1135,490 1270,490 ; RESET1.2@1270,426.42 1270,490 ; v1(1350,1205) 1385,1170 1385,1055 1270,940 1270,490
  Bottom Layer w10: U1.14@900,1114 1149,1114 1240,1205 v1(1350,1205) ; v2(1105,390) C20.1@1105,320 R53.2@1185,320
_XA6: U2.15
_XA7: U2.13
_XA8: U2.10
ADC1: C1.1 R2.1 U1.31 | length 938.7
  Top Layer w10: v5(760,485) v1(760,675)
  Bottom Layer w10: C1.1@575,5 R2.1@575,75 ; R2.1@585,85 650,150 720,150 760,190 v5(760,485) ; U1.31@733,829 733,702 v1(760,675)
ADC2: C2.1 R6.1 U1.30 | length 966.5
  Top Layer w10: v5(810,485) v1(810,675)
  Bottom Layer w10: U1.30@752,829 752,733 v1(810,675) ; v5(810,485) 810,195 860,145 950,145 R6.1@1005,90 ; C2.1@995,5 R6.1@995,75
ADC3: C3.1 R10.1 U1.29 | length 1367.7
  Top Layer w10: v1(850,675) 850,543.31 858.27,535.04 v5(858.27,484.25)
  Bottom Layer w10: U1.29@772,829 772,743 810,705 820,705 v1(850,675) ; v5(858.27,484.25) 858.27,191.73 880,170 1355,170 R10.1@1435,90 ; C3.1@1425,5 R10.1@1425,75
ADC4: C4.1 R14.1 U1.36 | length 2566.2
  Top Layer w10: v5(1315,625) 1390,625 1670,345 2330,345 v2(2480,195)
  Bottom Layer w10: U1.36@634,829 634,631 685,580 1070,580 1140,650 1245,650 1270,625 v5(1315,625) ; v2(2480,195) 2480,55 R14.1@2520,15
  Bottom Layer w20: R14.1@2520,15 2600,15 C4.1@2605,10
ADC5: C5.1 R18.1 U1.35 | length 2812.5
  Top Layer w10: v5(1314.96,681.1) 1383.9,681.1 1700,365 2630,365 v2(2650,385)
  Bottom Layer w10: U1.35@654,829 654,641 695,600 1055,600 1136.1,681.1 v5(1314.96,681.1) ; v2(2650,385) 2770,505 2855,505 R18.1@2925,435
  Bottom Layer w20: C5.1@2925,350 R18.1@2925,435
AGND: C1.2 C2.2 C3.2 C4.2 C5.2 C17.2 C18.2 D1.A D2.A D3.A D4.A D5.A R4.1 R8.1 R12.1 R16.1 R20.1 R92.1 U1.20 Z2.2 Z3.2 Z4.2 Z5.2 Z6.2 | length 7710.3
  Top Layer w20: v3(1445,210) 1550,315 2285,315 2633.86,-33.86 2633.86,-211.14 ; Z5.2@2633.86,-287.4 2633.86,-211.14 ; Z6.2@2980.31,-287.4 2980.31,-200.31 2960,-180 2665,-180 2633.86,-211.14
  Top Layer w40: v4(675,-105) v4(1075,-105) v4(1350,-105)
  Bottom Layer w10: U1.20@900,996 971,996 985,1010 1090,1010 C18.2@1130,1050 C17.2@1215,1050 1260,1005 1260,925 R92.1@1215,880
  Bottom Layer w20: R4.1@425,-80 500,-80 ; D1.A@500,-60 500,-80 ; C1.2@575,-75 C1.2@570,-80 ; v4(675,-105) 595,-105 C1.2@570,-80 ; R8.1@845,-75 920,-75 ; D2.A@920,-50 920,-75 ; v4(1075,-105) 1025,-105 C2.2@995,-75 920,-75 ; R12.1@1275,-75 1350,-75 ; v4(1350,-105) 1350,-75 ; C3.2@1425,-75 1350,-75 ; Z5.2@2633.86,-287.4 2690,-231.26 R16.1@2690,-140 2690,5 C4.2@2685,10 ; D5.A@2920,198.07 R20.1@2986.93,198.07 ; Z6.2@2980.31,-287.4 2980.31,-175.31 2965,-160 2860,-160 2770,-70 2770,80 2830,140 2955,140 R20.1@3000,185 3045,230 3045,310 C5.2@3005,350 ; 500,-80 C1.2@570,-80
  Bottom Layer w40: Z2.2@401.1,-287.4 401.1,-193.39 425.2,-169.29 653.54,-169.29 675,-147.83 v4(675,-105) ; Z3.2@885.35,-287.4 885.35,-185.51 893.7,-177.17 1043.31,-177.17 1075,-145.47 v4(1075,-105) ; R92.1@1215,880 1345,880 1360,865 1360,295 v3(1445,210) 1523.62,131.38 1523.62,-41.38 1405,-160 ; v4(1350,-105) 1405,-160 ; Z4.2@1369.61,-287.4 1369.61,-195.39 1405,-160
BUZZER: R45.1 T1.1 U1.68 | length 2121.7
  Top Layer w10: v1(-250,1420) -165,1505 v1(-165,1510)
  Bottom Layer w10: R45.1@-1050,2265 T1.1@-1050,2165 -1050,1955.51 -864.49,1770 -425,1770 v1(-165,1510) ; v1(-250,1420) -63,1233 U1.68@290,1233
CLK: R44.2 U1.12 | length 1109.7
  Top Layer w10: v1(1025,1405) 1140,1405 1180,1365 v1(1180,1190) ; v1(1190,1685) 1215,1660 v1(1215,1565)
  Bottom Layer w8: U1.12@900,1154 971,1154 990,1135 1135,1135 1180,1180 v1(1180,1190)
  Bottom Layer w10: v1(1025,1405) 1055,1405 v1(1215,1565) ; R44.2@1130,1685 v1(1190,1685)
D_RXD: R51.2 U1.56 | length 139
  Bottom Layer w10: R51.2@151,996 U1.56@290,996
D_TXD: R50.2 U1.55 | length 259
  Bottom Layer w10: R50.2@65,995 115,945 185,945 217,977 U1.55@290,977
E_CRS_DV: R33.1 U1.32 | length 1491.7
  Top Layer w8: v1(1240,820) 1240,965 v1(1355,1080)
  Bottom Layer w8: U1.32@713,829 713,667 730,650 1010,650 1180,820 v1(1240,820) ; v1(1355,1080) 1430,1155 1685,1155 R33.1@1725,1115
E_MDC: U1.16 U3.13 | length 1727.8
  Bottom Layer w8: U1.16@900,1075 965,1075 984,1094 1154,1094 1235,1175 1385,1175 1400,1190 1583.79,1190 1648.79,1255 2016.65,1255 2125,1146.65 2125,820 2098.66,793.66 U3.13@2098.66,774.21
E_MDIO: R23.1 U1.25 U3.12 | length 1976.4
  Top Layer w8: v1(1135,815) 1135,1025 v1(1215,1105)
  Bottom Layer w8: U1.25@900,898 947,898 965,880 965,825 1000,790 1110,790 v1(1135,815) ; v1(1215,1105) 1336.21,1105 1406.21,1175 1590,1175 1655,1240 1920,1240 R23.1@1960,1200 2030,1200 2110,1120 2110,880 2064.21,834.21 U3.12@2064.21,808.66
E_OSC: R36.1 U1.67 | length 2422.1
  Top Layer w10: v1(175,915) 205,945 v1(205,1035) ; v1(1315,515) v1(1410,515)
  Bottom Layer w10: v1(175,915) 141.73,881.73 141.73,633.86 261.59,514 1314,514 v1(1315,515) ; v1(205,1035) 205,1195 223,1213 U1.67@290,1213 ; v1(1410,515) 1410,685 1445,720 1600,720 R36.1@1635,755
E_REF_CLK: R26.1 U1.24 U3.14 | length 2331.1
  Top Layer w8: v1(1090,815) 1090,1030 1210,1150 v1(1210,1230) ; v1(1560,1230) 1625,1230 v1(1655,1200)
  Bottom Layer w8: U1.24@900,917 949.21,917 980,886.21 980,840 1005,815 v1(1090,815) ; v1(1210,1230) v1(1560,1230) 1590,1230 1630,1270 2033.15,1270 2140,1163.15 2140,765 2129.53,754.53 U3.14@2098.66,754.53 ; v1(1655,1200) R26.1@1720,1200
E_RST: U1.8 U3.15 | length 1807.7
  Bottom Layer w8: U1.8@900,1232 1152,1232 1175,1255 1580,1255 1610,1285 2049.65,1285 2155,1179.65 2155,758.79 2131.06,734.84 U3.15@2098.66,734.84
E_RXD0: R30.1 U1.33 | length 1129.2
  Top Layer w8: v1(1305,790) v1(1415,790)
  Bottom Layer w8: U1.33@693,829 693,662 720,635 1025,635 1180,790 v1(1305,790) ; v1(1415,790) 1495,790 R30.1@1555,850
E_RXD1: R31.1 U1.34 | length 1330
  Top Layer w8: v1(1305,750) v1(1415,750)
  Bottom Layer w8: U1.34@674,829 674,651 705,620 1040,620 1170,750 v1(1305,750) ; v1(1415,750) 1545,750 1595,800 1595,880 R31.1@1640,925
E_TX_EN: U1.48 U3.16 | length 3239
  Top Layer w8: v1(1210,600) 1210,975 1315,1080 v1(1315,1280)
  Bottom Layer w8: U1.48@398,829 398,592 430,560 1080,560 1120,600 v1(1210,600) ; v1(1315,1280) 1335,1300 2066.14,1300 2170,1196.14 2170,752.57 2132.58,715.16 U3.16@2098.66,715.16
E_TXD0: U1.51 U3.17 | length 3650
  Top Layer w8: v1(1170,570) 1170,598.43 1190,618.43 1190,990 1280,1080 v1(1280,1295)
  Bottom Layer w8: U1.51@290,898 229.21,898 190,858.79 190,665 310,545 1095,545 1120,570 v1(1170,570) ; v1(1280,1295) 1300,1315 2082.64,1315 2185,1212.64 2185,746.36 2134.11,695.47 U3.17@2098.66,695.47
E_TXD1: U1.52 U3.18 | length 3818.4
  Top Layer w8: v1(1135,545) 1135,599.57 1165,629.57 1165,1000 1250,1085 v1(1250,1315)
  Bottom Layer w8: U1.52@290,918 213.28,918 165.35,870.08 165.35,653.54 288.9,530 1120,530 v1(1135,545) ; v1(1250,1315) 1265,1330 2095.2,1330 2200,1225.2 2200,740.15 2135.64,675.79 U3.18@2098.66,675.79
ELED1A: R34.1 ZE1.10 | length 213.4
  Bottom Layer w10: R34.1@2035,145 2035,100 2083.98,51.02 ZE1.10@2183.11,51.02
ELED2A: R35.1 ZE1.12 | length 113.9
  Bottom Layer w10: R35.1@1685,145 1685,99.13 ZE1.12@1733.11,51.02
ERX+: TR1.11 ZE1.3 | length 450.6
  Top Layer w10: TR1.11@1936,189 1936,84 2063.11,-43.11 ZE1.3@2063.11,-208.98
ERX-: TR1.9 ZE1.6 | length 372.3
  Top Layer w10: TR1.9@1836,189 1836,114 1943.11,6.89 ZE1.6@1943.11,-138.98
ETH9: TR1.15
ETH10: TR1.10
ETH11: TR1.13
ETH12: TR1.12
ETH13: ZE1.4
ETH14: ZE1.5
ETH15: ZE1.7
ETH16: ZE1.8
ETX+: TR1.16 ZE1.1 | length 434.9
  Top Layer w10: ZE1.1@2143.11,-208.98 2143.11,-3.11 2120,20 2120,80 2186,146 TR1.16@2186,189
ETX-: TR1.14 ZE1.2 | length 335.1
  Top Layer w10: TR1.14@2086,189 2086,-11 2103.11,-28.11 ZE1.2@2103.11,-138.98
GND: B1.CG1 B1.CG2 B1.CG3 C6.1 C7.1 C8.1 C9.1 C10.1 C11.1 C12.1 C13.1 C14.1 C19.1 C20.2 C21.1 C22.2 C23.2 C24.2 C25.2 C26.2 C27.2 C28.2 C32.1 C34.2 C35.1 C36.1 C37.1 C38.1 C40.1 C41.1 CN1.5 CN1.6 D6.A D7.A D8.A G1.2 GND.1 GND.2 K1.1 KY1.2 KY2.2 R32.1 R37.1 R38.1 R39.1 R45.2 R49.1 R55.2 R87.2 R88.2 R89.2 R91.2 R92.2 R95.2 RESET1.1 SWD1.2 T1.2 T2.2 U1.10 U1.27 U1.74 U1.99 U2.1 U2.7 U3.25 U4.9 u5.1 u5.10 u5.19 U6.3 U6.7 U6.9 U7.1 U8.5 Z7.2 Z9.1 Z10.1 Z11.1 Z13.2 ZE1.9 ZE1.11 ZE1.G1 ZE1.G2 | length 30632.4
  Top Layer w10: C41.1@-465,1350 -380,1435 v1(-335,1435) ; v2(950,340) 948.58,341.42 RESET1.1@948.58,425 948.58,568.58 975,595 v1(975,675)
  Top Layer w20: GND.2@-1074.8,1855.91 GND.1@-1074.8,1755.91 -967.44,1648.54 CN1.6@-967.44,1458.43 ; CN1.6@-1073.74,1222.2 CN1.6@-1073.74,1234.02 CN1.6@-1073.74,1320.63 CN1.6@-1073.74,1399.37 CN1.6@-1073.74,1485.98 CN1.6@-1073.74,1497.8 ; CN1.6@-967.44,1261.57 CN1.5@-967.44,1308.82 ; Z10.1@-35.65,877.67 -35.65,790.65 150,605 ; v2(225,680) 150,605 ; v2(285,280) 285,470 150,605 ; ZE1.G1@1683.11,-173.98 1823.11,-33.98 ZE1.11@1823.11,51.02 ; v2(1705,585) 1705,670 1720,685 ; ZE1.9@2273.11,51.02 2273.11,-123.98 ZE1.G2@2323.11,-173.98
  Top Layer w40: C36.1@-784.09,1185.94 -784.09,1220.91 -655,1350 C41.1@-465,1350 ; v7(-730,525) -725,525 -610.28,410.28 B1.CG3@-610.28,68.43 -610.28,-104.72 -590,-125 Z13.2@-590,-285 ; v3(-250,1700) -125,1825 v3(-125,1905) -125,2075 -85,2115 750,2115 ; Z10.1@-35.65,877.67 52.33,877.67 80,850 235,850 405,1020 735,1020 v2(815,940) ; SWD1.2@305,1995 395,1905 730,1905 ; v2(410,1300) 630,1300 v2(665,1335) ; v3(1035,880) 875,880 v2(815,940) ; v3(1720,2115) 750,2115 ; v2(2040,990) 2040,895 2015,870 v6(2015,725) ; v2(2230,660) 2230,695 2200,725 v6(2015,725) ; K1.1@3910,405 3910,545 3865,590 2610,590 2435,765 KY2.2@2435,885 2435,1185 KY1.2@2440,1190 2295,1335 1485,1335 ; v2(665,1335) 665,1450 730,1515 ; v2(665,1335) 665,1265 710,1220 v2(810,1220) 815,1215 v2(815,940) ; 730,1515 1235,1515 1415,1335 1485,1335 ; 730,1515 730,1905 ; 730,1905 Z11.1@730,1995 730,2095 750,2115 ; 1485,1335 1485,1165 1645,1005 v2(1645,685) 1720,685 1760,725 v6(2015,725)
  Bottom Layer w10: C25.2@-1080,710 -1045,675 -980,675 -970,685 -970,805 -965,810 -855,810 -845,800 U8.5@-845,740 ; -425,1900 -425,2130 -250,2305 u5.19@-250,2350 ; T2.2@-395,1525 -425,1525 -430,1520 -430,1475 -420,1465 -365,1465 v1(-335,1435) ; C19.1@55,1350 55,1390 ; C22.2@55,1430 55,1390 ; SWD1.2@305,1995 375,1925 R49.1@375,1890 ; v2(410,1300) 410,1330 389,1351 U1.74@290,1351 224,1351 185,1390 55,1390 ; v2(665,1335) 700,1370 805,1370 812,1377 U1.99@812,1439 812,1492 835,1515 975,1515 C28.2@1015,1475 ; v2(810,1220) 837,1193 U1.10@900,1193 C23.2@1037,1193 ; v2(815,940) 811,936 U1.27@811,829 811,770 821,760 865,760 895,790 955,790 C27.2@1002.98,742.02 ; v2(950,340) 970,320 C20.2@1025,320 ; v1(975,675) 1000,700 C27.2@1000,739.04 ; R39.1@1565,1115 1617,1063 1897,1063 1945,1015 C14.1@1960,1015 ; ZE1.11@1823.11,51.02 1891.02,51.02 1925,85 R37.1@1925,145 ; ZE1.9@2273.11,51.02 R38.1@2273.11,143.11
  Bottom Layer w20: CN1.6@-1075,1496.54 -1075,1460 -1073.43,1458.43 ; CN1.6@-1073.43,1222.52 -1073.43,1458.43 ; -1071.85,1261.57 CN1.6@-967.44,1261.57 -945.87,1240 R91.2@-875,1240 -784.09,1240 ; R45.2@-975,2260 T1.2@-975,2165 -975,2130 -930,2085 -930,1890 -840,1800 -350,1800 v3(-250,1700) ; CN1.6@-967.44,1458.43 -1073.43,1458.43 ; U8.5@-845,740 -845,685 -815.21,655.21 R55.2@-815.21,595.13 -680,459.91 D8.A@-680,402.91 -680,357.09 D7.A@-817.09,220 ; u5.10@-650,1975 -650,1905 -645,1900 -425,1900 -205,1900 ; -480,475 -481,476 U6.7@-481,602 -481,684 U6.9@-450,715 ; U6.9@-431,734 U6.3@-431,827 ; -225,560 R87.2@-175,610 R88.2@-95,610 ; -200,305 R89.2@-140,305 ; u5.1@-200,1975 -200,1905 -205,1900 ; -199.11,395.89 C34.2@-142.74,395.89 ; v3(-125,1905) -130,1900 -205,1900 ; v2(225,680) 290,615 C21.1@340,615 ; v2(285,280) 285,255 295,245 R95.2@365,245 ; v2(740,1610) C26.2@800,1610 890,1610 G1.2@898,1618 ; v2(1645,685) 1715,755 C11.1@1720,755 C13.1@1805,755 ; C6.1@1700,340 1700,580 v2(1705,585) 1745,585 ; v3@1720,2130 1735.83,2114.17 U4.9@1805,2114.17 ; R32.1@1745,500 1745,585 ; C8.1@1790,585 1745,585 ; C14.1@1960,1015 2015,1015 v2(2040,990) C12.1@2040,920 ; v2(2230,660) 2255,660 ; C10.1@2260,755 C9.1@2260,585 2345,500 2345,270 2330,255 C7.1@2300,255 2300,225 2273.11,198.11 R38.1@2273.11,143.11 ; C40.1@3105,445 3105,415 3135,385 U2.1@3135,345 3135,255 3170,220 3435,220 ; U2.7@3435,345 3435,220 ; K1.1@3940,405 K1.1@3910,405 3770,405 Z9.1@3585,220 3435,220
  Bottom Layer w40: C37.1@-784.09,1520.94 -784.09,1460 -745,1420.91 -745,1330 -784.09,1290.91 -784.09,1240 C36.1@-784.09,1185.94 -735,1136.85 -735,1090 ; U7.1@-635,1087 -732,1087 -735,1090 ; B1.CG3@-610.28,68.43 B1.CG2@-413.43,68.43 B1.CG1@-315,166.85 -228.15,166.85 -200,195 -200,305 -200,535 -225,560 -255,590 -255,715 ; C32.1@-515,474.87 C38.1@-415,474.87 ; C35.1@-255,955 -205,905 -205,825 ; Z10.1@-35.65,877.67 -88.33,825 -205,825 ; Z7.2@397.64,2720.47 397.64,2537.36 730,2205 Z11.1@730,1995 ; v3(1035,880) R92.2@1135,880 ; ZE1.G1@1683.11,-173.98 1787.09,-70 2219.13,-70 ZE1.G2@2323.11,-173.98 ; -735,1090 -735,792.09 D6.A@-655,712.09 -652.09,715 U6.9@-450,715 -255,715 ; -255,715 -255,730 -205,780 -205,825
GNDI: C15.1 C16.1 K1.3 U2.9 U2.16 Z9.2 Z12.4 | length 2324.1
  Top Layer w20: Z12.4@3602.36,-287.4 3602.36,-74.8 3700.79,23.62 3960.63,23.62 3984.25,47.24 3984.25,185.04 3964.29,205 K1.3@3910,205 3735,205 C15.1@3661.04,278.96
  Bottom Layer w20: C16.1@3135,-145 U2.16@3135,-30 3135,50 3170,85 3485,85 ; U2.9@3485,-30 3485,85 ; K1.3@3940,205 K1.3@3910,205 3805,205 3755,155 3655,155 Z9.2@3585,85 3485,85
KY1: F19.2 R47.1 U1.6 | length 1747.1
  Bottom Layer w10: U1.6@900,1272 1117,1272 1212,1367 2156.62,1367 2223.62,1300 F19.2@2495,1300
  Bottom Layer w20: F19.2@2495,1300 R47.1@2495,1385